# Altium PCB demo_dermis_main_testboard_scratch.PcbDoc (part 6 of 7)
Units mm, origin at the board's own origin, x right, y up, seen from the top; angles counter-clockwise.
Board outline 348.67 x 247.5 mm, 4 copper layers (Top Layer, Layer 1, Layer 2, Bottom Layer), stack 0.603 mm thick; 416 components, 288 nets, 1934 pads, 1690 vias.
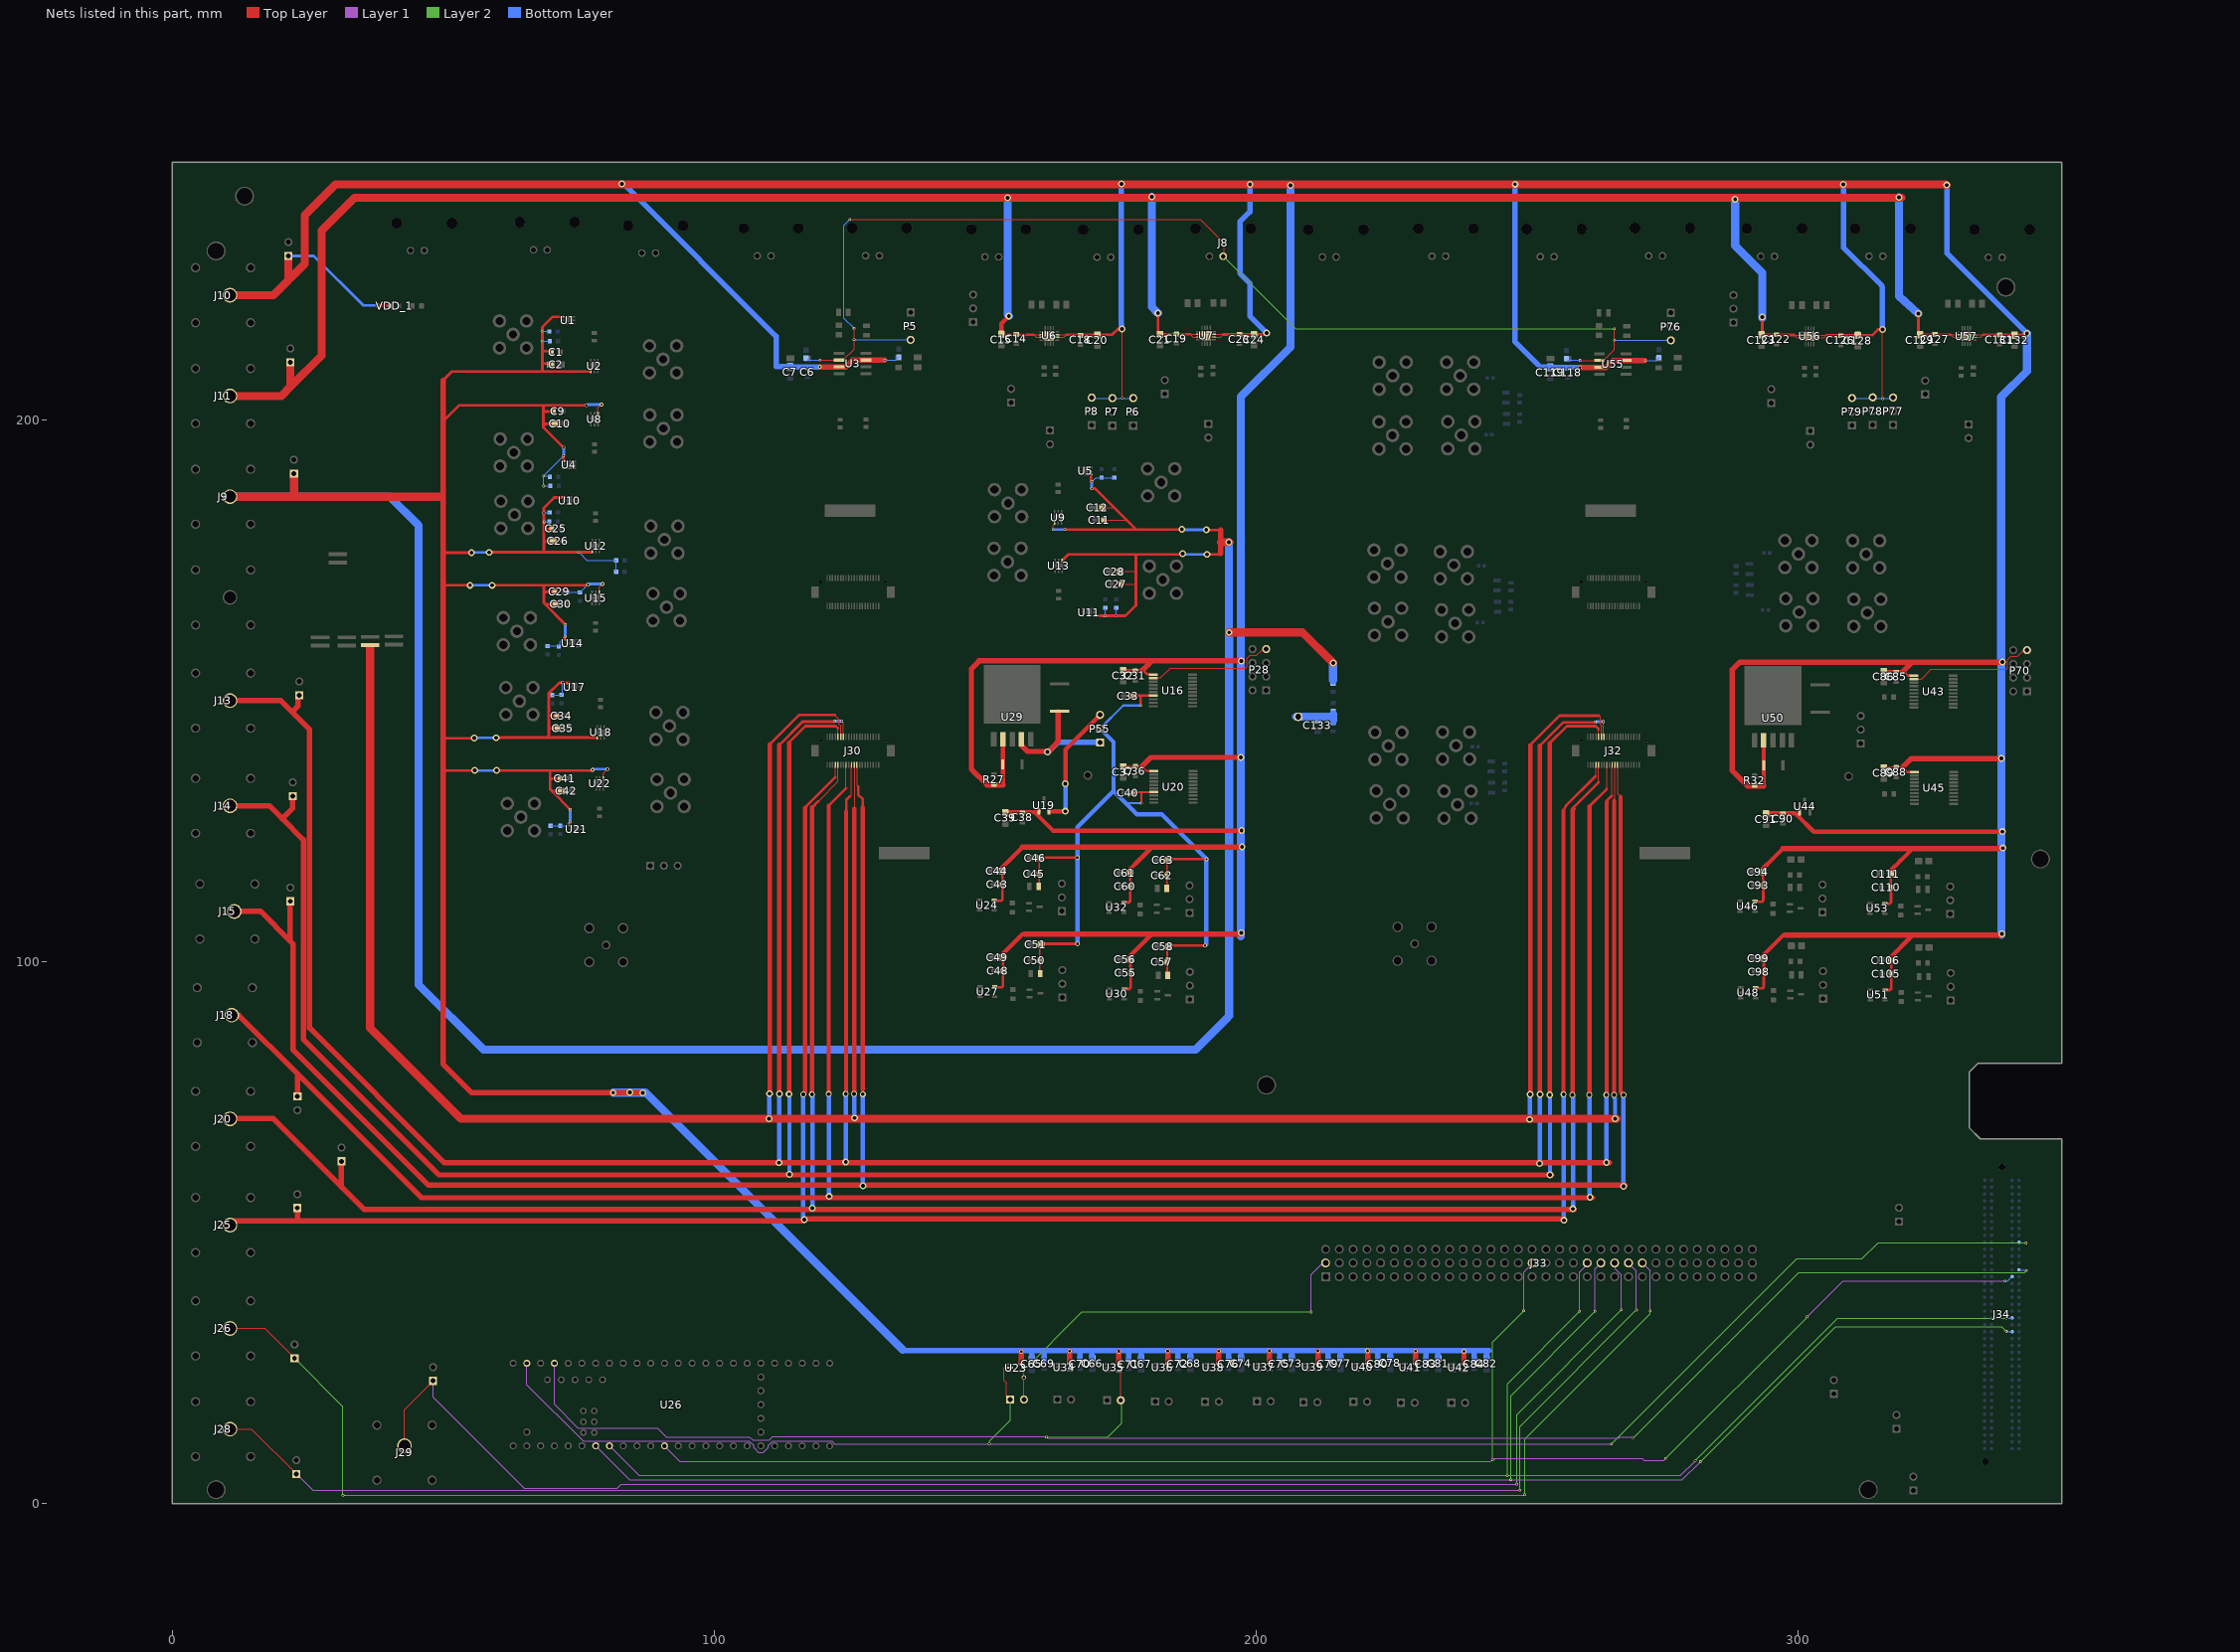
[diagram p7: the nets of this part, all layers, seen from the top]

## Via types
v1: diameter 0.85, hole 0.5, Top Layer to Bottom Layer, 1036 vias
v2: diameter 0.5, hole 0.3, Top Layer to Bottom Layer, 455 vias
v3: diameter 1.27, hole 0.711, Top Layer to Bottom Layer, 133 vias
v4: diameter 0.7, hole 0.4, Top Layer to Bottom Layer, 26 vias
v5: diameter 0.4, hole 0.25, Top Layer to Bottom Layer, 24 vias
v6: diameter 1.1, hole 0.7, Top Layer to Bottom Layer, 16 vias

## Nets (pads, with @x,y where several pads share a name; then routed paths per layer and width w, separated by ;. In a path a pad name is that pad's centre, name@x,y a point inside that pad or via, vN(x,y) a via of type N, cw(c..) or ccw(c..) an arc to the next point about the centre after c; other vN are vias at no path point) (continued)
REQON_EXT: J34.C14 P62.2 U26.2 U35.4 | length 321.4
  Top Layer w0.15: P62.2@175.008,19.064 175.008,24.354 U35.4@175.088,24.434
  Layer 1 w0.15: U26.2@70.525,25.89 70.525,18.288 74.843,13.97 89.536,13.97 91.195,12.311 106.516,12.311 107.116,11.711 110.135,11.711 110.782,12.358 v2@161.215,12.358 ; v2@161.127,12.18 161.215,12.268 v2(161.31,12.268) 161.495,12.083 266.882,12.083 267.058,12.26 267.451,12.26 267.455,12.256 269.432,12.256 v2(269.538,12.15)
  Layer 2 w0.15: v2(161.31,12.268) 172.632,12.268 175.201,14.837 175.201,18.872 P62.2@175.008,19.064 ; v2(269.538,12.15) 269.703,12.15 300.156,42.602 341.711,42.602 v2(342.132,43.024)
  Bottom Layer w0.15: J34.C14@340.746,43.146 340.806,43.085 342.071,43.085 v2(342.132,43.024)
RESETb: J33.47 J34.D15 U26.15 | length 303.3
  Layer 1 w0.15: U26.15@90.845,10.65 93.673,7.822 243.203,7.822 v2@243.383,8.001 ; v2(243.593,8.116) 243.66,8.183 243.989,8.183 244.118,8.312 271.241,8.312 271.581,7.972 275.207,7.972 v2(275.551,8.317) ; v2(249.364,35.592) 249.414,35.642 249.414,42.701 250.904,44.191 J33.47@250.904,44.403 ; v2(301.634,34.459) 308.251,41.076 v2(338.196,41.076)
  Layer 2 w0.15: v2(243.593,8.116) 243.593,29.821 v2(249.364,35.592) ; v2(275.551,8.317) 301.634,34.4 v2(301.634,34.459)
  Bottom Layer w0.15: v2(338.196,41.076) 338.675,41.076 J34.D15@339.476,41.876
RST: J33.2 P61.2 U23.4 | length 76.8
  Top Layer w0.15: U23.4@156.672,24.421 U23.4@157.062,24.421 ; v1(157.131,23.252) 157.131,24.583 157.182,24.633 157.182,24.524 157.079,24.421 U23.4@157.062,24.421 ; P61.2@157.165,19.198 157.165,24.318 U23.4@157.062,24.421
  Layer 1 w0.15: v2@210.128,35.352 210.128,42.258 212.273,44.403 J33.2@212.804,44.403
  Layer 2 w0.15: v1(157.131,23.252) 157.131,24.602 167.882,35.352 v2(210.152,35.352) ; J33.2@212.681,44.28 J33.2@212.804,44.403
RST_EXT: J34.C10 P61.1 U23.2 U26.0 | length 321.3
  Top Layer w0.15: U23.2@154.59,25.071 154.579,25.081 153.459,25.081 153.459,22.723 153.95,22.232 153.95,19.873 P61.1@154.625,19.198 ; v2@341.972,48.16 v2(342.049,48.083)
  Layer 1 w0.15: U26.0@65.445,25.89 65.445,21.931 75.848,11.529 106.45,11.529 107.293,10.685 107.293,10.314 108.137,9.471 109.114,9.471 109.958,10.314 109.958,10.685 110.801,11.529 121.69,11.529 122.189,11.03 v2(150.764,11.03) 265.522,11.03 v2@265.542,11.009
  Layer 2 w0.15: v2(150.764,11.03) 150.764,11.53 154.625,15.39 P61.1@154.625,19.198 ; v2(265.521,10.981) 299.701,45.16 311.757,45.16 314.757,48.16 v2@341.972,48.16
  Bottom Layer w0.15: J34.C10@340.746,48.226 340.821,48.15 341.982,48.15 v2(342.049,48.083)
SCLK: J33.59 J34.D21 U26.19 | length 318.4
  Layer 1 w0.15: U26.19@80.685,10.65 86.105,5.23 v2@246.305,5.23 ; v2(246.325,5.185) 278.266,5.185 v2(280.998,7.917) ; v2(259.667,35.475) 259.667,42.736 261.064,44.132 J33.59@261.064,44.403
  Layer 2 w0.15: v2(246.325,5.185) 246.325,22.133 v2(259.667,35.475) ; v2@280.96,7.918 307.266,34.224 v2(338.399,34.224)
  Bottom Layer w0.15: v2(338.399,34.224) 338.415,34.24 339.459,34.24 J34.D21@339.476,34.256
SDI: J33.62 J34.D23 U26.20 | length 322.9
  Layer 1 w0.15: U26.20@78.145,10.65 84.411,4.383 v2@246.982,4.383 ; v2(246.982,4.371) v2@246.982,4.383 ; v2(262.529,35.471) 262.493,35.507 262.493,43.292 J33.62@263.604,44.403 ; v2(281.931,7.717) 278.597,4.383 v2@246.982,4.383
  Layer 2 w0.15: v2(246.982,4.371) 246.982,19.924 v2(262.529,35.471) ; v2@281.975,7.703 306.882,32.611 337.567,32.611 v2(338.384,31.794)
  Bottom Layer w0.15: v2(338.384,31.794) 338.423,31.755 339.437,31.755 J34.D23@339.476,31.716
VBIAS_2P5V: C33.1 C40.1 C45.1 C46.1 C50.1 C51.1 C57.1 C58.1 C62.1 C63.1 P55.2 R25.1 R26.1 R28.1 R29.1 U16.7 U20.7 | length 156.5
  Top Layer w0.3: R25.1@159.965,114.422 159.965,118.928 C46.1@160,118.989 ; R26.1@160.066,97.794 C51.1@160.066,102.977 ; R29.1@183.531,114.087 C63.1@183.531,118.593 ; R28.1@183.596,97.637 C58.1@183.596,102.643
  Top Layer w0.4: C33.1@177.233,149.052 177.233,149.101 178.668,149.101 ; C40.1@177.3,131.301 178.834,131.301 ; v2(178.668,147.274) 178.668,149.101 ; v2(178.834,129.256) 178.834,131.301 ; U20.7@181.094,131.301 178.834,131.301 ; U16.7@181.244,149.101 178.668,149.101
  Top Layer w0.5: C46.1@160,118.989 160.282,119.272 160.341,119.213 v1(167.003,119.213) ; C51.1@160.101,103.038 160.231,103.168 160.383,103.32 160.39,103.314 v1(167.026,103.314) ; C63.1@183.565,118.654 183.695,118.784 183.848,118.937 183.854,118.93 190.796,118.93 v4(190.834,118.892) ; C58.1@183.631,102.704 183.761,102.835 183.913,102.987 183.92,102.98 v4(190.556,102.98)
  Bottom Layer w0.4: P55.2@171.195,143.01 175.458,147.274 v2(178.668,147.274) ; 173.675,131.71 176.129,129.256 v2(178.834,129.256)
  Bottom Layer w0.8: v1@167,103.314 167,124.822 173.675,131.497 ; P55.2@171.195,143.01 173.675,140.529 173.675,131.71 173.675,131.497 ; v4@190.774,103.199 v4@190.774,118.892 ; v4@190.774,118.99 182.571,127.192 177.98,127.192 173.675,131.497
VD: J26.1 J33.71 P42.1 | length 314.1
  Top Layer w0.2: J26.1@10.67,32.33 17.079,32.33 P42.1@22.589,26.82
  Layer 1 w0.2: v2(31.518,1.565) v2@249.541,1.565 ; J33.71@271.224,44.403 272.665,42.961 v2(272.665,35.574)
  Layer 2 w0.2: P42.1@22.589,26.82 31.518,17.891 v2(31.518,1.565) ; v2(249.541,1.63) 249.537,1.634 249.537,11.877 272.665,35.006 v2(272.665,35.574)
VDAC_RESERVED0: P28.7 U16.2 | length 23.7
  Top Layer w0.2: U16.2@181.278,152.385 182.364,152.385 184.184,154.205 198.062,154.205 198.316,154.459 198.316,155.966 198.877,156.528 200.074,156.528 201.028,157.482 201.643,157.482 P28.7@201.856,157.695
VDAC_RESERVED1: P70.7 U43.2 | length 23.7
  Top Layer w0.2: U43.2@321.638,152.184 322.725,152.184 324.545,154.004 338.423,154.004 338.676,154.258 338.676,155.765 339.238,156.326 340.434,156.326 341.388,157.281 342.003,157.281 P70.7@342.216,157.494
VDD_2P5V: C54.1 P55.1 U29.4 | length 25.4
  Top Layer w0.2: U29.4@156.531,140.273 U29.4@156.531,141.851
  Top Layer w1: U29.4@156.726,139.858 157.781,138.803 161.505,138.745 161.751,138.741 163.465,140.675 C54.1@163.465,146.069
  Bottom Layer w1: v3@161.568,138.609 163.428,140.47 P55.1@171.195,140.47
  other v3: 161.504,138.673
VDD_3P3V_IN: C1.1 C2.1 C9.1 C10.1 C11.1 C12.1 C25.1 C26.1 C27.1 C28.1 C29.1 C30.1 C34.1 C35.1 C41.1 C42.1 C65.1 C66.1 C67.1 C68.1 C69.1 C70.1 C71.1 C72.1 C73.1 C74.1 C75.1 C76.1 C77.1 C78.1 C79.1 C80.1 C81.1 C82.1 C83.1 C84.1 J9.1 P3.1 R46.1 R47.1 R48.1 R49.1 R50.1 R51.1 R52.1 R53.1 R54.1 R55.1 R56.1 R57.1 R58.1 R59.1 R60.1 R61.1 R62.1 R63.1 R64.1 R65.1 R66.2 U1.4 U2.4 U4.4 U5.4 U8.4 U9.4 U10.4 U11.4 U12.4 U13.4 U14.4 U15.4 U17.4 U18.4 U21.4 U22.4 U23.5 U34.5 U35.5 U36.5 U37.5 U38.5 U39.5 U40.5 U41.5 U42.5 | length 1261.4
  Top Layer w0.15: 68.299,210.392 68.318,210.373 ; 68.63,199.243 68.649,199.224 ; C12.1@171.655,183.749 171.687,183.782 173.677,183.782 ; C11.1@171.884,181.454 175.969,181.454 ; C28.1@174.792,171.987 174.824,172.02 177.799,172.02 ; C27.1@175.021,169.692 177.783,169.692 177.799,169.674
  Top Layer w0.2: U4.4@72.134,192.454 U4.4@72.22,192.368 ; U8.4@78.571,201.152 78.571,202.188 v4(79.217,202.833) ; U15.4@78.76,168.034 78.76,169.07 v4(79.405,169.715) ; U22.4@79.501,134.009 79.501,134.723 v4(80.307,135.529) ; v2(162.532,179.773) 162.532,180.526 162.819,180.813 U9.4@162.819,180.966
  Top Layer w0.5: 49.723,135.282 49.989,135.282 v3(55.856,135.283) ; 49.855,141.241 49.989,141.241 v3(55.743,141.242) ; 49.989,169.466 49.992,169.468 v3(54.952,169.47) ; 49.989,199.69 52.985,202.686 68.483,202.686 ; 49.989,207.267 51.656,208.934 68.299,208.934 ; 50.294,175.49 v3(55.236,175.49) ; v3(58.477,175.53) 58.511,175.564 68.58,175.564 ; v3(59.073,169.468) v4@76.614,169.468 ; v3@59.485,141.378 69.483,141.378 ; v3@59.714,135.282 59.976,135.282 v4@77.517,135.282 ; 68.318,210.373 C2.1@69.88,210.373 ; 68.394,212.668 C1.1@69.65,212.668 ; 68.563,169.27 68.563,166.219 v2(72.55,162.231) ; 68.632,179.817 C25.1@70.112,179.817 ; 68.649,199.224 C10.1@70.211,199.224 ; 68.692,168.242 C29.1@70.181,168.242 ; 68.725,201.519 C9.1@69.982,201.519 ; 68.779,177.521 C26.1@70.341,177.521 ; 68.849,165.946 C30.1@70.41,165.946 ; 69.626,143.044 C35.1@71.188,143.044 ; 69.702,145.339 C34.1@70.959,145.339 ; 69.717,135.146 69.717,131.834 70.105,131.446 ; 69.757,133.742 C41.1@71.195,133.742 ; C42.1@71.424,131.446 70.105,131.446 ; U1.4@72.034,219.027 70.198,219.027 68.299,217.128 68.299,210.392 68.299,208.934 ; U4.4@72.134,192.454 72.223,192.542 v2(72.223,193.372) ; v2@72.235,194.863 68.483,198.614 68.483,202.686 ; U10.4@72.283,185.749 72.315,185.657 70.479,185.657 68.58,183.758 v2(68.58,182.833) 68.58,175.564 ; U14.4@72.504,159.497 v2(72.504,160.002) ; U17.4@73.21,151.37 73.218,151.471 71.382,151.471 69.483,149.572 69.483,141.378 ; U21.4@73.407,125.213 v2(73.407,125.815) ; v2(73.458,128.093) 70.105,131.446 ; v4(76.426,202.686) 68.483,202.686 ; 77.067,208.934 68.299,208.934 ; U12.4@77.348,175.564 68.58,175.564 ; 78.252,141.378 69.483,141.378 ; U13.4@164.22,174.066 164.263,174.066 165.356,175.159 ; v2@164.623,179.754 v2(164.684,179.754) v3@186.3,179.754 ; 165.488,175.159 v3@186.409,175.159 ; U5.4@169.506,189.9 169.506,188.73 v2(169.655,188.581) ; v2(169.668,187.314) 170.283,187.314 177.714,179.884 ; U11.4@170.151,163.832 175.9,163.832 177.799,165.73 177.799,169.674 177.799,172.02 177.799,174.929 ; v3(190.797,179.681) 193.185,179.681 ; v3(190.907,175.158) 193.295,175.158
  Top Layer w1: 49.989,185.549 49.989,169.466 49.989,141.241 49.989,135.282 49.989,81.114 55.269,75.834 v3(81.374,75.834) v3@86.692,75.834 ; 49.989,186.038 49.989,199.69 49.989,207.267 ; 156.672,26.115 v1@156.672,28.047 ; 165.577,26.205 v1@165.577,28.138 ; 174.63,26.151 v1(174.63,28.085) ; 183.69,26.201 v1@183.69,28.134 ; 193.059,26.201 v1@193.059,28.134 ; 193.479,175.321 193.479,179.681 ; 202.432,26.246 v1@202.432,28.179 ; 211.393,26.24 v1@211.393,28.173 ; 220.562,26.251 v1@220.562,28.184 ; 229.41,26.19 v1@229.41,28.123 ; 238.339,26.16 v1@238.339,28.093
  Top Layer w1.5: J9.1@10.67,185.809 22.476,185.809 ; P3.1@22.476,190.095 22.476,185.809 ; 49.729,185.809 22.476,185.809 ; 193.536,177.423 v3(194.994,177.423) ; v3(195.003,160.77) 208.523,160.77 v3(214.191,155.102)
  Bottom Layer w0.15: v2(68.251,214.497) 69.463,214.497 R46.1@69.484,214.518 ; v2(68.26,216.362) R47.1@69.439,216.362 ; v2@68.514,189.639 v2(68.514,187.783) R48.1@69.725,187.783 ; v2(68.58,182.833) 69.545,182.833 R51.1@69.628,182.916 ; v2(68.619,181.191) 69.601,181.191 R50.1@69.615,181.205 ; R52.1@69.064,158.243 71.206,158.243 71.232,158.216 71.255,158.216 71.557,158.519 71.557,159.055 v2(72.504,160.002) ; R49.1@69.701,189.647 v2(68.522,189.647) v2@72.243,193.368 ; R56.1@69.806,125.09 72.682,125.09 v2(73.407,125.815) ; R54.1@70.132,149.199 71.823,149.199 R55.1@71.847,149.224 71.977,149.354 v2(71.977,151.489) ; R62.1@72.904,168.116 72.948,168.159 R63.1@75.211,168.159 75.233,168.159 76.207,169.133 76.207,169.161 76.614,169.568 v4(76.757,169.568) ; v2(74.999,175.592) 76.512,174.079 R65.1@81.917,174.079 81.92,174.076 R64.1@81.92,171.945 ; v2(169.655,188.581) 170.396,189.323 R59.1@171.478,189.323 171.487,189.332 R58.1@173.829,189.332 ; v2(172.13,163.81) 172.13,165.287 R61.1@172.175,165.332 ; v2(174.142,163.835) 174.142,165.308 R60.1@174.167,165.333 ; R66.2@214.171,151.271 214.171,151.954
  Bottom Layer w0.2: v3(54.952,169.47) v3(54.952,169.47) ; v3(55.236,175.49) v3@55.255,175.51 ; v3@58.457,175.51 v3(58.477,175.53) ; v2@72.243,194.782 v2(72.243,194.925)
  Bottom Layer w0.5: v3(54.952,169.47) v3(59.073,169.468) ; v3@55.255,175.51 v3@58.457,175.51 ; v3@55.554,141.324 v3(59.797,141.324) v3@60.09,141.324 ; v3@55.856,135.282 v3@60.199,135.282 ; v2@72.243,193.392 v2@72.243,194.782 ; v2@72.525,160.022 v2@72.525,162.292 ; v2@73.458,125.821 v2(73.458,128.093) ; v4@76.573,202.833 v4(79.217,202.833) ; v4@76.76,169.715 v4(79.405,169.715) ; v4@77.663,135.529 v4(80.307,135.529) ; v2(162.532,179.773) 162.55,179.754 v2(164.684,179.754) ; v2(169.668,187.314) v2@169.668,188.581 ; v3@186.51,179.701 v3@190.777,179.701 ; v3@186.619,175.178 v3@190.887,175.178
  Bottom Layer w1: 134.86,28.195 156.672,28.196 158.551,28.196 ; C65.1@158.6,26.565 C65.1@158.6,26.665 158.6,28.146 158.551,28.196 ; 160.86,28.116 160.86,26.535 C69.1@160.889,26.658 ; C70.1@167.458,26.609 167.458,28.19 ; C66.1@169.717,26.579 169.717,28.16 ; C71.1@176.512,26.555 176.512,28.136 ; C67.1@178.77,26.525 178.77,28.106 ; C72.1@185.571,26.605 185.571,28.186 ; C68.1@187.83,26.574 187.83,28.155 ; C76.1@194.94,26.605 194.94,28.186 ; C74.1@197.2,26.574 197.2,28.155 ; C75.1@204.313,26.65 204.313,28.196 ; 204.313,28.231 204.313,28.196 ; C73.1@206.572,26.62 206.572,28.196 ; 206.572,28.201 206.572,28.196 ; C79.1@213.275,26.644 213.275,28.196 ; 213.275,28.225 213.275,28.196 ; C77.1@215.533,26.614 215.533,28.195 ; C80.1@222.443,26.655 222.443,28.196 ; 222.443,28.236 222.443,28.196 ; C78.1@224.703,26.624 224.703,28.196 ; 224.703,28.205 224.703,28.196 ; C83.1@231.291,26.594 231.291,28.175 ; C81.1@233.55,26.563 233.55,28.145 ; C84.1@240.22,26.564 240.22,28.145 ; C82.1@242.479,26.534 242.479,28.115 ; 242.94,28.196 224.703,28.196 ; 158.551,28.196 204.313,28.196 ; 204.313,28.196 206.572,28.196 ; 206.572,28.196 213.275,28.196 ; 213.275,28.196 222.443,28.196 ; 222.443,28.196 224.703,28.196
  Bottom Layer w1.5: J9.1@10.67,185.809 40.136,185.809 45.442,180.504 45.442,95.742 57.44,83.743 188.788,83.743 194.805,89.76 194.805,89.805 195.003,90.002 v3@195.003,160.506 ; v3(81.374,75.834) 87.348,75.834 134.79,28.392 ; v3@194.975,177.423 v3@194.975,177.404 ; v3(194.994,177.423) v3@194.975,177.404 ; v3(195.003,160.77) v3@195.003,160.506 ; 214.171,151.954 214.191,151.974 v3(214.191,155.102) ; v3@194.975,177.404 194.975,160.77 194.975,160.479 v3@195.003,160.506
  other v1: 156.672,28.048 238.338,28.094 229.409,28.123 165.576,28.139 183.689,28.135 193.058,28.135 202.431,28.18 211.393,28.174 220.562,28.185
  other v3: 86.856,75.767 84.434,75.863 59.885,135.323 186.409,175.29 186.3,179.812
  other v4: 77.583,135.382
VDD_5V_IN: C6.1 C7.1 C8.1 C18.1 C20.1 C23.1 C24.1 C31.1 C32.1 C36.1 C37.1 C38.1 C39.1 C43.1 C44.1 C48.1 C49.1 C53.1 C55.1 C56.1 C60.1 C61.1 C85.1 C86.1 C88.1 C89.1 C90.1 C91.1 C93.1 C94.1 C98.1 C99.1 C103.1 C105.1 C106.1 C110.1 C111.1 C118.1 C119.1 C120.1 C126.1 C128.1 C131.1 C132.1 J10.1 P6.3 P7.3 P8.3 P11.1 P77.3 P78.3 P79.3 R27.2 R32.2 U3.3 U3.7 U6.6 U6.7 U7.6 U7.7 U16.1 U19.1 U20.1 U24.5 U27.5 U29.2 U30.5 U32.5 U43.1 U44.1 U45.1 U46.5 U48.5 U50.2 U51.5 U53.5 U55.3 U55.7 U56.6 U56.7 U57.6 U57.7 VDD_1.A | length 1594.4
  Top Layer w0.15: C37.1@175.294,136.21 C37.1@175.455,136.21 ; C37.1@175.469,136.196 C37.1@175.455,136.21 ; C37.1@175.479,136.208 C37.1@175.455,136.21 ; C37.1@175.479,136.208 C37.1@175.595,136.196 ; C89.1@315.655,136.009 C89.1@315.815,136.009 ; C89.1@315.83,135.995 C89.1@315.815,136.009 ; C89.1@315.839,136.007 C89.1@315.815,136.009 ; C89.1@315.84,136.007 C89.1@315.955,135.995
  Top Layer w0.2: v4(119.492,209.761) v4@119.496,209.756 ; 129,211.018 129.003,211.015 v2(131.505,211.015) ; C43.1@153.168,114.576 C43.1@153.195,114.549 ; C48.1@153.269,98.625 C48.1@153.296,98.598 ; U6.6@163.281,215.224 164.515,215.224 164.999,215.708 163.298,215.708 U6.7@163.281,215.725 ; v2@175.263,204.176 v3(175.263,216.771) ; C60.1@176.734,114.241 C60.1@176.761,114.214 ; C55.1@176.799,98.291 C55.1@176.826,98.264 ; U7.6@192.177,215.283 193.411,215.283 193.895,215.767 192.193,215.767 U7.7@192.177,215.784 ; U55.7@267.945,210.914 U55.7@268.269,210.916 ; C93.1@293.529,114.375 C93.1@293.556,114.348 ; C98.1@293.63,98.424 C98.1@293.657,98.397 ; U56.6@303.554,215.145 304.788,215.145 305.271,215.629 U56.7@303.57,215.629 ; v2@315.536,204.097 v3(315.536,216.692) ; C110.1@317.094,114.04 C110.1@317.121,114.013 ; C105.1@317.16,98.09 C105.1@317.187,98.063 ; U57.6@332.449,215.204 333.683,215.204 334.167,215.688 U57.7@332.466,215.688
  Top Layer w0.4: C39.1@153.718,127.474 C39.1@153.845,127.601 ; C37.1@175.453,135.957 175.469,136.051 178.92,136.051 179.77,135.201 U20.1@181.094,135.201 ; C32.1@175.619,153.851 179.07,153.851 179.92,153.001 U16.1@181.244,153.001 ; C91.1@294.078,127.272 C91.1@294.205,127.4 ; 299.923,127.077 U44.1@300.327,127.474 ; U44.1@300.249,127.554 U44.1@300.328,127.475 ; C89.1@315.813,135.756 315.83,135.85 319.28,135.85 320.13,135 U45.1@321.455,135 ; C86.1@315.98,153.65 318.058,153.65 319.43,153.65 320.28,152.8 U43.1@321.605,152.8
  Top Layer w0.5: v1(37.96,221.061) VDD_1.A@40.111,221.061 ; U24.5@151.929,111.247 152.963,111.247 153.195,111.48 C43.1@153.195,114.549 ; U27.5@152.03,95.296 153.064,95.296 153.296,95.529 C48.1@153.296,98.598 ; C43.1@153.168,114.576 C44.1@153.168,116.962 ; C48.1@153.269,98.625 C49.1@153.269,101.011 ; 164.999,215.708 173.422,215.708 174.484,216.771 v3(175.263,216.771) ; U32.5@175.6,110.969 175.494,110.912 176.528,110.912 176.761,111.145 C60.1@176.761,114.214 ; U30.5@175.665,95.02 175.56,94.962 176.594,94.962 176.826,95.195 C55.1@176.826,98.264 ; C60.1@176.734,114.241 C61.1@176.734,116.627 ; C55.1@176.799,98.291 C56.1@176.799,100.677 ; 193.895,215.767 199.632,215.767 v3@202.317,215.767 ; U46.5@292.289,111.046 293.323,111.046 293.556,111.279 C93.1@293.556,114.348 ; U48.5@292.39,95.095 293.424,95.095 293.657,95.328 C98.1@293.657,98.397 ; C93.1@293.529,114.375 C94.1@293.529,116.761 ; C98.1@293.63,98.424 C99.1@293.63,100.81 ; 305.271,215.629 313.694,215.629 314.757,216.692 v3(315.536,216.692) ; U53.5@315.96,110.768 315.855,110.711 316.889,110.711 317.121,110.944 C110.1@317.121,114.013 ; U51.5@316.026,94.819 315.92,94.761 316.954,94.761 317.187,94.994 C105.1@317.187,98.063 ; C110.1@317.094,114.04 C111.1@317.094,116.426 ; C105.1@317.16,98.09 C106.1@317.16,100.476 ; 334.167,215.688 339.904,215.688 v3@342.59,215.688
  Top Layer w0.8: C44.1@153.168,116.962 153.168,117.42 154.923,119.174 156.853,121.103 ; C49.1@153.269,101.011 153.269,101.468 155.024,103.223 156.954,105.152 ; 153.28,132.617 U29.2@153.28,141.057 ; C39.1@153.845,127.601 159.088,127.601 162.494,124.195 v3(197.294,124.195) ; 159.451,127.326 U19.1@159.888,127.755 ; C61.1@176.734,116.627 176.734,117.084 178.489,118.839 180.418,120.768 ; C56.1@176.799,100.677 176.799,101.135 178.554,102.889 180.484,104.818 ; C94.1@293.529,116.761 293.529,117.219 295.284,118.973 297.213,120.902 ; C99.1@293.63,100.81 293.63,101.267 297.314,104.951 ; 293.641,132.416 293.641,136.207 U50.2@293.641,140.856 ; C91.1@294.205,127.4 299.449,127.4 299.771,127.077 302.855,123.994 v3(337.655,123.994) ; C111.1@317.094,116.426 317.094,116.883 318.849,118.638 320.778,120.567 ; C106.1@317.16,100.476 317.16,100.934 320.844,104.618
  Top Layer w1: v4@119.496,209.756 124.262,209.756 125.506,210.999 v2@131.42,210.999 ; 153.28,132.617 150.342,132.617 147.451,135.509 147.451,154.058 148.895,155.501 180.72,155.501 ; 156.853,121.103 196.618,121.103 196.683,121.169 v3(197.387,121.169) ; 157.406,105.128 v3@197.172,105.128 ; 178.92,136.051 180.57,137.701 v3(197.131,137.701) ; 179.07,153.851 180.72,155.501 ; v3(197.281,155.501) 180.72,155.501 ; v4@259.769,209.677 264.535,209.677 265.778,210.92 v2@271.714,210.92 ; 293.641,132.416 291.96,132.416 290.703,132.416 287.812,135.308 287.812,153.856 289.256,155.3 321.08,155.3 ; 297.213,120.902 336.978,120.902 337.044,120.968 v3(337.748,120.968) ; 297.766,104.927 v3@337.532,104.927 ; 319.28,135.85 320.93,137.5 v3(337.492,137.5) ; 319.43,153.65 321.08,155.3 ; v3(337.641,155.3) 321.08,155.3
  Top Layer w1.5: J10.1@10.569,223.088 10.569,223.005 18.697,223.005 21.449,225.758 P11.1@21.449,230.238 ; 21.777,226.086 24.488,228.797 24.488,237.78 30.174,243.464 327.22,243.464 v3(327.369,243.316)
  Bottom Layer w0.15: v1@37.898,221.122 v1(37.96,221.061)
  Bottom Layer w0.2: v2(131.505,211.015) 131.524,211.033 133.506,211.033 134.037,211.564 C8.1@134.037,211.592 ; P8.3@169.139,204.002 P7.3@173.467,204.002 P6.3@177.796,204.002 ; v2@271.796,210.954 273.778,210.954 274.309,211.485 C120.1@274.309,211.513 ; P79.3@309.412,203.923 P77.3@318.068,203.923
  Bottom Layer w0.5: P11.1@21.449,230.238 26.123,230.238 35.238,221.122 v1@37.898,221.122
  Bottom Layer w1: v3@83.514,243.311 111.43,215.394 111.43,209.837 111.461,209.806 C7.1@114.018,209.806 ; C7.1@113.652,209.777 v4@119.454,209.777 ; v3@175.125,243.612 v3(175.125,243.563) 175.125,217.411 175.211,217.324 175.211,216.823 v3(175.263,216.771) ; v3(198.852,243.428) 198.852,238.371 197.011,236.53 197.011,227.028 198.852,225.187 198.852,219.107 v3(201.942,216.017) ; v3(247.753,243.484) 247.731,243.462 247.731,214.457 252.462,209.726 C119.1@254.291,209.726 ; C119.1@254.291,209.698 v4@259.726,209.698 ; v3(308.352,243.429) 308.352,231.76 315.455,224.72 ; v3@315.484,217.245 315.484,224.449 ; v3@327.449,243.316 327.449,230.704 v3(342.215,215.938)
  Bottom Layer w1.5: 197.156,104.675 197.156,137.701 197.156,204.248 206.312,213.404 v3(206.312,243.286) ; v3@337.428,155.422 337.428,204.169 342.215,208.955 v3(342.215,215.938) ; v3@337.516,104.927 337.516,120.968 337.516,123.994 337.516,204.047
  other v2: 315.602,203.919 175.329,203.999 271.778,210.936
  other v3: 337.599,105.121 197.238,105.322 82.996,243.522
  other v4: 259.764,209.682
VDD_ADC_3V: J20.1 J30.32 J32.32 P34.1 | length 427.2
  Top Layer w0.2: 119.209,129.603 122.836,133.229 122.836,134.474 122.826,134.483 122.826,136.226 122.836,136.235 J30.32@122.845,136.33 ; 263.169,133.095 263.169,133.804 263.155,133.818 263.155,136.316 J32.32@263.169,136.33
  Top Layer w0.5: 118.056,128.45 119.209,129.603 ; 258.626,128.552 263.169,133.095
  Top Layer w0.8: v6(118.056,75.525) 118.056,128.45 ; v6(258.36,75.415) 258.36,128.033 258.543,128.216
  Top Layer w1: J20.1@10.674,71 10.702,71.028 18.662,71.028 31.242,58.448 ; P34.1@31.223,63.169 31.242,63.15 31.242,58.448 ; v3@258.654,54.301 35.389,54.301 31.242,58.448
  Bottom Layer w0.15: v6(118.056,75.525) 118.07,75.525 v6@118.114,75.481 ; v6(258.36,75.415) 258.379,75.415 v6@258.447,75.347
  Bottom Layer w0.5: v3(118.114,54.518) v3@118.162,54.566 ; v6@118.114,75.481 v6@118.162,75.433 ; v3(258.447,54.383) v3@258.495,54.431 ; v6@258.447,75.347 v6@258.495,75.299
  Bottom Layer w0.8: v3@118.162,54.566 v6@118.162,75.433 ; v3@258.495,54.431 v6@258.495,75.299
VDD_AFE_3V: J25.1 J30.34 J32.34 P37.1 | length 420.9
  Top Layer w0.2: 122.335,134.044 122.335,136.247 J30.34@122.345,136.33 ; 262.6,134.197 262.669,134.129 J32.34@262.669,136.33
  Top Layer w0.5: 116.756,128.398 117.101,128.743 117.101,128.81 122.335,134.044 ; 256.694,127.894 257.089,128.686 262.6,134.197
  Top Layer w0.8: v6@116.756,75.915 116.756,128.398 ; v6@256.694,75.807 256.694,127.894
  Top Layer w1: J25.1@10.674,51.398 11.472,52.196 23.152,52.196 ; P37.1@23.103,54.561 23.152,54.513 23.152,52.196 ; v3@256.783,52.196 256.458,52.521 116.938,52.521 116.613,52.196 23.152,52.196
  Bottom Layer w0.8: v6(116.438,75.526) 116.438,52.57 v3(116.619,52.389) ; v3@256.719,52.74 v6(256.719,75.539)
  other v3: 256.78,52.272
VDD_DIG_3V: J15.1 J30.18 J32.18 P26.1 | length 452.8
  Top Layer w0.2: J30.18@126.36,136.44 126.36,132.49 126.567,132.283 ; J32.18@266.669,136.33 266.694,136.305 266.694,130.932 267.238,130.388
  Top Layer w0.5: 126.567,132.283 126.567,130.819 127.425,129.961 127.425,128.497 ; v6(127.425,75.551) 127.425,76.425
  Top Layer w0.8: 127.425,76.425 127.425,128.497 ; 267.238,130.388 267.238,75.938 v6(267.759,75.417)
  Top Layer w1: J15.1@11.515,109.317 16.254,109.317 21.792,103.778 ; P26.1@21.792,111.148 21.792,103.778 ; v3@268.027,58.742 47.296,58.742 22.303,83.735 22.303,103.268 21.792,103.778
  Top Layer w1.5: J15.1@11.469,109.27 J15.1@11.515,109.317
  Bottom Layer w0.8: v3(127.425,58.654) v6(127.425,75.551) ; v3(267.759,58.52) v6(267.759,75.417)
VDD_DIG_6V: J13.1 J30.22 J30.27 J32.22 J32.27 P23.1 | length 660
  Top Layer w0.2: v2@122.238,144.318 v2(122.295,144.375) ; v2(123.563,144.404) 123.563,144.323 123.845,144.042 J30.27@123.845,141.625 ; 124.938,130.547 125.101,130.71 125.335,130.71 J30.22@125.335,136.465 ; v2@262.571,144.184 v2(262.628,144.241) ; v2(264.065,144.313) 264.065,141.585 J32.27@264.169,141.48 ; 265.669,130.752 J32.22@265.669,136.33
  Top Layer w0.5: 112.028,140.026 116.319,144.318 v2@122.238,144.318 ; 124.335,127.708 124.375,127.748 124.375,129.861 125,130.486 ; 252.361,139.892 256.653,144.184 v2@262.571,144.184 ; 264.69,129.478 264.69,129.708 265.569,130.587
  Top Layer w0.8: v3(112.028,75.636) 112.028,140.026 112.028,140.066 ; v6@124.335,75.701 124.335,127.708 ; v3(252.361,75.501) 252.361,139.892 ; v6@264.669,75.567 264.669,129.457 264.69,129.478
  Top Layer w1: J13.1@10.674,148.175 20.026,148.175 22.129,146.073 ; P23.1@23.462,149.167 23.212,148.918 23.212,147.156 22.129,146.073 ; v3@265.137,62.925 v3(264.618,62.925) 252.293,62.925 124.284,62.925 111.959,62.925 50.187,62.925 25.341,87.771 25.341,142.86 22.129,146.073
  Bottom Layer w0.5: v3(111.959,62.908) v3@111.993,62.943 ; v3@111.993,75.602 v3(112.028,75.636) ; v2(122.295,144.375) 122.324,144.404 v2(123.563,144.404) ; v3(252.293,62.774) v3@252.327,62.808 ; v3@252.327,75.468 v3(252.361,75.501) ; v2(262.628,144.241) 262.662,144.208 262.767,144.313 v2(264.065,144.313)
  Bottom Layer w0.8: v3@111.993,62.943 v3@111.993,75.602 ; v3(124.284,63.06) v6(124.284,75.583) ; v3@252.327,62.808 v3@252.327,75.468 ; v3(264.618,62.925) v6(264.618,75.449)
VDD_IO_3P3V: J14.1 J30.31 J32.31 P24.1 | length 481.8
  Top Layer w0.2: J30.31@122.836,141.615 122.836,143.077 ; J32.31@263.169,141.48 263.169,142.943
  Top Layer w0.5: 113.829,140.456 116.854,143.482 122.431,143.482 122.836,143.077 ; 254.163,140.321 257.322,143.48 262.631,143.48 263.169,142.943
  Top Layer w0.8: v3(113.829,75.558) 113.829,140.456 ; v3(254.163,75.424) 254.163,140.321
  Top Layer w1: J14.1@10.674,128.764 17.914,128.764 20.302,126.376 ; P24.1@22.233,130.571 22.233,128.308 20.302,126.376 ; v3@254.567,60.659 49.191,60.659 24.191,85.658 24.191,122.487 20.302,126.376
  Bottom Layer w0.8: v3(113.888,60.768) v3@113.888,75.5 ; v3(254.221,60.633) v3@254.221,75.366
VDD_TDIG_3V: J18.1 J30.26 J32.26 P29.1 | length 431.4
  Top Layer w0.2: 124.335,131.995 J30.26@124.335,136.465 ; 264.669,131.86 J32.26@264.669,136.33
  Top Layer w0.5: 23.109,78.659 23.429,78.979 ; 121.134,128.793 124.335,131.995 ; 261.467,128.659 264.669,131.86
  Top Layer w0.8: v6(121.134,75.576) 121.134,128.793 ; v6(261.467,75.442) 261.467,128.659
  Top Layer w1: J18.1@11.003,90.135 12.273,90.135 23.429,78.979 45.973,56.435 v3@262.037,56.435 ; P29.1@23.109,75.099 23.109,78.659
  Bottom Layer w0.15: v6(121.134,75.576) v6@121.254,75.456 ; v6(261.467,75.442) v6@261.587,75.322
  Bottom Layer w0.5: v3@121.194,56.736 v3(121.254,56.676) ; v6@121.194,75.396 v6@121.254,75.456 ; v3@261.527,56.602 v3(261.587,56.542) ; v6@261.527,75.262 v6@261.587,75.322
  Bottom Layer w0.8: v3@121.194,56.736 v6@121.194,75.396 ; v3@261.527,56.602 v6@261.527,75.262
VDIV_1P5V: C133.1 J43.1 R67.1 R68.2 | length 7.5
  Bottom Layer w1.5: J43.1@207.388,145.225 213.719,145.225 ; 214.196,145.694 214.199,145.691 214.199,144.517
VG: J28.1 J33.68 P45.1 | length 294.1
  Top Layer w0.2: J28.1@10.67,13.74 14.648,13.74 P45.1@22.928,5.461
  Layer 1 w0.2: P45.1@22.928,5.461 25.946,2.442 v2(248.659,2.442) ; J33.68@268.684,44.403 270.149,42.938 270.149,35.721 v2(270.151,35.719)
  Layer 2 w0.2: v2(248.659,2.442) 248.659,14.227 v2(270.151,35.719)
VNEG: C14.1 C15.1 C19.1 C21.1 C122.1 C123.1 C127.1 C129.1 J11.1 P13.1 U6.14 U6.15 U6.17 U7.14 U7.15 U7.17 U56.14 U56.15 U56.17 U57.14 U57.15 U57.17 | length 487.9
  Top Layer w0.2: C15.1@152.994,215.762 153,215.756 C15.1@153.031,215.725 ; U6.15@160.399,215.218 160.393,215.224 U6.15@160.386,215.224 159.46,215.224 158.959,215.725 U6.14@160.386,215.725 161.583,215.725 U6.17@161.834,215.474 ; U7.15@189.295,215.277 189.289,215.283 188.355,215.283 187.855,215.784 190.479,215.784 U7.17@190.729,215.533 ; C123.1@293.267,215.683 293.281,215.668 C123.1@293.303,215.646 ; U56.15@300.672,215.139 300.666,215.145 U56.15@300.658,215.145 299.732,215.145 299.232,215.646 U56.14@300.658,215.646 301.856,215.646 U56.17@302.106,215.396 ; U57.15@329.567,215.198 329.561,215.204 328.628,215.204 328.128,215.705 330.751,215.705 U57.17@331.002,215.454
  Top Layer w0.5: C15.1@153.001,215.759 153,215.756 152.987,215.725 C15.1@153.031,215.725 ; C15.1@153.316,215.725 158.959,215.725 ; C21.1@181.882,215.784 v3(181.882,219.705) ; C21.1@182.793,215.784 187.855,215.784 ; v3(293.359,218.958) 293.359,215.746 293.281,215.668 293.26,215.646 293.303,215.646 299.232,215.646 ; C129.1@322.155,215.705 v3(322.155,219.626) ; C129.1@323.065,215.705 328.128,215.705
  Top Layer w0.8: C15.1@152.994,215.762 152.994,217.775 v3(154.367,219.148)
  Top Layer w1.5: J11.1@10.67,204.398 20.125,204.398 21.918,206.192 ; P13.1@21.827,210.612 21.827,206.284 21.918,206.192 ; v3@319.07,240.96 v3(154.135,240.96) 33.631,240.96 27.571,234.9 27.571,211.844 21.918,206.192
  Bottom Layer w1.5: v3(154.135,240.96) 154.135,219.381 v3(154.367,219.148) ; v3(180.744,241.149) 180.744,220.844 v3(181.882,219.705) ; v3(288.364,240.68) 288.364,232.15 293.359,227.154 v3(293.359,218.958) v3@293.359,218.783 ; v3(318.603,241.064) 318.603,222.821 v3(322.155,219.626)
VOCM_IN: C3.1 C115.1 J8.2 P5.3 P76.3 U3.2 U55.2 | length 219.9
  Top Layer w0.2: v2(119.506,211.042) 119.516,211.031 U3.2@122.909,211.031 ; U3.2@123.058,211.031 U3.2@123.069,211.021 123.78,211.021 125.824,213.066 v2(125.824,216.877) ; v2(125.031,236.996) 189.646,236.996 194.077,232.565 194.077,230.347 J8.2@193.905,230.174 ; v2(259.779,210.963) 259.789,210.952 U55.2@263.178,210.952 ; U55.2@263.331,210.952 U55.2@263.341,210.942 264.052,210.942 266.097,212.987 v2(266.097,216.798)
  Layer 2 w0.2: J8.2@193.905,230.174 207.28,216.798 v2(266.097,216.798)
  Bottom Layer w0.2: C3.1@117.111,211.215 117.267,211.06 v2@119.506,211.06 ; v2(125.031,236.996) 123.942,235.907 123.942,218.76 v2(125.824,216.877) ; v2(125.798,214.766) 125.807,214.758 136.24,214.758 P5.3@136.248,214.749 ; C115.1@257.383,211.136 257.539,210.981 v2@259.779,210.981 ; v2(266.07,214.687) 266.079,214.679 276.512,214.679 P76.3@276.521,214.67
VREF_2P5V: P55.3 U19.2 | length 23.5
  Top Layer w0.8: U19.2@161.788,127.755 v3(164.813,127.755) ; v3(164.813,132.87) 164.813,139.169 P55.3@171.195,145.55
  Bottom Layer w0.8: v3(164.813,127.755) v3(164.813,132.87)
VS: J29.1 J33.65 P48.1 | length 273.7
  Top Layer w0.2: J29.1@42.865,10.67 42.865,17.366 P48.1@48.15,22.651
  Layer 1 w0.2: P48.1@48.15,22.651 48.15,19.595 64.953,2.792 82.13,2.792 82.859,3.522 v2@247.973,3.522 ; J33.65@266.144,44.403 266.306,44.24 266.306,43.278 267.395,42.189 v2(267.395,35.768)
  Layer 2 w0.2: v2(248.07,3.574) 248.07,16.443 v2(267.395,35.768)
VSS: J30.20 J30.29 J32.20 J32.29 R15.2 | length 613.6
  Top Layer w0.2: 122.224,145.526 123.014,144.736 123.014,143.846 123.335,143.524 J30.29@123.335,141.615 ; v6(125.82,75.606) v6@125.836,75.621 ; J30.20@125.836,136.465 125.836,136.33 125.836,128.247 ; 263.234,145.391 263.499,145.127 263.499,143.667 263.669,143.496 J32.29@263.669,141.48 ; v6(266.038,75.401) v6@266.188,75.251 ; 266.169,129.839 J32.20@266.169,136.33
  Top Layer w0.5: 110.229,140.098 115.657,145.526 122.224,145.526 ; 250.563,139.963 255.99,145.391 263.234,145.391
  Top Layer w0.8: v3(110.229,75.651) 110.229,140.098 ; v6@125.836,75.621 125.836,128.247 ; v3(250.563,75.516) 250.563,139.963 ; v6(266.038,75.401) 266.038,129.69
  Top Layer w1.5: 36.485,87.795 36.533,87.746 ; 36.533,157.875 36.533,87.746 ; v3@266.498,71.02 v3(266.222,71.02) 53.259,71.02 36.533,87.746
  Bottom Layer w0.2: v6(125.82,75.606) v6@125.855,75.572 ; v3@125.855,71.189 v3(125.889,71.154) ; v3@266.188,71.055 v3(266.222,71.02)
  Bottom Layer w0.5: v3(250.437,70.89) v3@250.5,70.952 ; v3@250.5,75.454 v3(250.563,75.516)
  Bottom Layer w0.8: v3@110.166,71.087 v3@110.166,75.588 ; v3@125.855,71.189 v6@125.855,75.572 ; v3@250.5,70.952 v3@250.5,75.454 ; v6(266.038,75.401) 266.038,74.939 266.222,74.755 266.222,71.089 v3@266.188,71.055
  other v3: 110.104,71.024
pads on no net: C1.0 C2.0 C6.0 C7.0 C9.0 C10.0 C11.0 C12.0 C14.0 C15.0 C18.0 C19.0 C20.0 C21.0 C23.0 C24.0 C25.0 C26.0 C27.0 C28.0 C29.0 C30.0 C31.0 C32.0 C33.0 C34.0 C35.0 C36.0 C37.0 C38.0 C39.0 C40.0 C41.0 C42.0 C43.0 C44.0 C45.0 C46.0 C47.0 C48.0 C49.0 C50.0 C51.0 C52.0 C55.0 C56.0 C57.0 C58.0 C59.0 C60.0 C61.0 C62.0 C63.0 C64.0 C65.0 C66.0 C67.0 C68.0 C69.0 C70.0 C71.0 C72.0 C73.0 C74.0 C75.0 C76.0 C77.0 C78.0 C79.0 C80.0 C81.0 C82.0 C83.0 C84.0 C85.0 C86.0 C87.0 C88.0 C89.0 C90.0 C91.0 C92.0 C93.0 C94.0 C95.0 C96.0 C97.0 C98.0 C99.0 C100.0 C101.0 C102.0 C105.0 C106.0 C107.0 C108.0 C109.0 C110.0 C111.0 C112.0 C113.0 C114.0 C118.0 C119.0 C122.0 C123.0 C126.0 C127.0 C128.0 C129.0 C131.0 C132.0 C133.0 J1.3 J1.5 J2.3 J2.5 J3.3 J3.5 J4.3 J4.5 J5.3 J5.5 J6.3 J6.5 J7.3 J7.5 J8.3 J8.5 J9.2 J9.3 J9.4 J9.5 J10.2 J10.3 J10.4 J10.5 J11.2 J11.3 J11.4 J11.5 J12.2 J12.3 J12.4 J12.5 J13.2 J13.3 J13.4 J13.5 J14.2 J14.3 J14.4 J14.5 J15.2 J15.3 J15.4 J15.5 J16. J18.2 J18.3 J18.4 J18.5 J20.2 J20.3 J20.4 J20.5 J23. J25.2 J25.3 J25.4 J25.5 J26.2 J26.3 J26.4 J26.5 J28.2 J28.3 J28.4 J28.5 J29.2 J29.3 J29.4 J29.5 J30. J32. J34. J34.C02 J34.C03 J34.C06 J34.C07 J34.C30 J34.C31 J34.C34 J34.C37 J34.D01 J34.D04 J34.D05 J34.D24 J34.D26 J34.D27 J34.D29 J34.D30 J34.D31 J34.D32 J34.D33 J34.D34 J34.D35 J34.D36 J34.D38 J34.D40 J34.G02 J34.G03 J34.G06 J34.G07 J34.G09 J34.G10 J34.G12 J34.G13 J34.G15 J34.G16 J34.G18 J34.G19 J34.G21 J34.G22 J34.G24 J34.G25 J34.G27 J34.G28 J34.G30 J34.G31 J34.G33 J34.G34 J34.G36 J34.G37 J34.H01 J34.H02 J34.H04 J34.H05 J34.H08 J34.H10 J34.H11 J34.H13 J34.H14 J34.H16 J34.H17 J34.H19 J34.H20 J34.H22 J34.H23 J34.H25 J34.H26 J34.H28 J34.H29 J34.H31 J34.H32 J34.H34 J34.H35 J34.H37 J34.H38 J34.H40 J36.3 J36.5 J37.3 J37.5 J38.3 J38.5 J39.3 J39.5 J40.3 J40.5 J41.3 J41.5 J42.3 J42.5 R27.0 R32.0 R85.0 U6.8 U7.8 U16.5 U16.6 U16.15 U16.16 U16.17 U20.5 U20.6 U20.15 U20.16 U20.17 U23.1 U26.3.3V_1 U26.3.3V_2 U26.3.3V_3 U26.5V U26.41 U26.D+ U26.D- U26.LED U26.ON/OFF U26.PROGRAM U26.R+ U26.R- U26.T+ U26.T- U26.USB_GND1 U26.USB_GND2 U26.VBAT U26.VIN U26.VUSB U34.1 U35.1 U36.1 U37.1 U38.1 U39.1 U40.1 U41.1 U42.1 U43.5 U43.6 U43.15 U43.16 U43.17 U45.5 U45.6 U45.15 U45.16 U45.17 U56.8 U57.8 VDD_1.0
copper on no net: | length 0.1
  Bottom Layer w0.15: 262.106,173.401 262.156,173.351
  Bottom Layer w0.2: 332.913,217.223 332.917,217.223

## Polygon pours and split planes (outlines as drawn)
GND on Top Layer (solid, pour order 298): 139 vertices, not listed, extent 126.706,139.892 129.22,145.475
GND on Top Layer (solid, pour order 294): 141 vertices, not listed, extent 266.996,139.892 269.493,145.37
GND on Top Layer "Top Layer-GND 5" (solid, remove dead copper, pour order 234): 60 vertices, not listed, extent 1.005,1.275 373.408,246.059
GND on Top Layer "Top Layer-GND 1" (solid, pour order 236): 123.249,157.723 122.33,157.723 104.025,139.419 104.025,118.7 56.532,118.7 56.532,84.39 199.339,84.39 204.301,89.352 204.853,89.352 204.853,158.642 204.027,159.468 124.018,159.468 124.018,158.519 123.222,157.723
CHIPB_VCM on Top Layer "Top Layer-CHIPB_VCM" (solid, remove dead copper, pour order 214): 18 vertices, not listed, extent 214.924,122.427 277.003,219.391
CHIPB_VCM on Top Layer "Top Layer-CHIPB_VCM 1" (solid, remove dead copper, pour order 212): 326.866,186.637 326.866,162.194 323.673,159 276.015,159 276.015,163.299 276.875,164.159 278.717,164.159 278.717,166.861 298.738,186.883 299.23,186.391 326.498,186.391
CHIPA_VCM on Top Layer "Top Layer-CHIPA_VCM" (solid, remove dead copper, pour order 210): 28 vertices, not listed, extent 55.515,121.936 204.4,222.859
GND on Top Layer "Top Layer-GND" (solid, remove dead copper, pour order 244): 48 vertices, not listed, extent 2.861,193.203 239.389,246.965
GND on Top Layer "Top Layer-GND 6" (solid, pour order 242): 56.86,74.662 56.621,74.423 57.816,73.229 207.378,73.229 207.378,87.086 204.511,89.953 57.099,89.953 57.099,86.847 56.86,86.608
GND on Top Layer "Top Layer-GND 11" (solid, pour order 240): 57.103,118.491 56.667,118.927 45.993,118.927 45.993,77.755 44.468,76.23 59.281,76.23 59.281,118.709 59.499,118.927
GND on Top Layer "Top Layer-GND 10" (solid, pour order 238): 215.822,117.646 215.386,118.081 203.187,118.081 203.187,75.384 218.001,75.384 218.001,117.864 218.218,118.081
GND on Top Layer "Top Layer-GND 5" (solid, remove dead copper, shelved, pour order 70): 60 vertices, not listed, extent 0.978,1.206 373.382,245.99
GND on Top Layer "Top Layer-GND 1" (solid, shelved, pour order 170): 123.222,157.654 122.303,157.654 103.999,139.35 103.999,118.63 56.506,118.63 56.506,84.32 199.312,84.32 204.275,89.283 204.826,89.283 204.826,158.573 204,159.399 123.991,159.399 123.991,158.45 123.195,157.653
GND on Top Layer "Top Layer-GND 10" (solid, shelved, pour order 196): 215.796,117.576 215.36,118.012 203.161,118.012 203.161,75.315 217.974,75.315 217.974,117.794 218.192,118.012
GND on Top Layer "Top Layer-GND 11" (solid, shelved, pour order 192): 57.077,118.422 56.641,118.857 45.966,118.857 45.966,77.685 44.442,76.161 59.255,76.161 59.255,118.64 59.472,118.857
CHIPA_VCM on Top Layer "Top Layer-CHIPA_VCM" (solid, remove dead copper, shelved, pour order 66): 28 vertices, not listed, extent 55.338,122.378 204.222,223.302
CHIPA_VCM on Top Layer "Top Layer-CHIPA_VCM" (solid, remove dead copper, shelved, pour order 22): 29 vertices, not listed, extent 55.336,122.38 204.221,223.303
CHIPB_VCM on Top Layer "Top Layer-CHIPB_VCM 1" (solid, remove dead copper, shelved, pour order 82): 325.956,186.499 325.956,162.056 322.763,158.862 275.105,158.862 275.105,163.161 275.965,164.021 277.807,164.021 277.807,166.723 297.828,186.745 298.32,186.253 325.588,186.253
CHIPB_VCM on Top Layer "Top Layer-CHIPB_VCM" (solid, remove dead copper, shelved, pour order 80): 18 vertices, not listed, extent 214.014,122.289 276.093,219.253
GND on Top Layer "Top Layer-GND 6" (solid, shelved, pour order 174): 56.834,74.593 56.595,74.354 57.789,73.16 207.352,73.16 207.352,87.017 204.485,89.884 57.072,89.884 57.072,86.777 56.834,86.539
GND on Top Layer "Top Layer-GND" (solid, remove dead copper, shelved, pour order 14): 48 vertices, not listed, extent 2.835,193.134 239.363,246.896
GND on Top Layer "Top Layer-GND 3" (solid, shelved, pour order 46): 125.353,152.502
GND on Top Layer "Top Layer-GND 4" (solid, shelved, pour order 44): 119.845,150.417
GND on Layer 1 (solid, pour order 296): 303 vertices, not listed, extent 78.258,101.256 129.22,152.173
GND on Layer 1 "Top Layer-GND 5" (solid, remove dead copper, pour order 248): 60 vertices, not listed, extent 1.004,1.276 373.408,246.06
GND on Layer 1 "Top Layer-GND 1" (solid, pour order 258): 123.248,157.724 122.329,157.724 104.025,139.42 104.025,118.7 56.531,118.7 56.531,84.39 199.338,84.39 204.301,89.353 204.852,89.353 204.852,158.643 204.026,159.469 124.017,159.469 124.017,158.52 123.221,157.723
CHIPB_VCM on Layer 1 "Top Layer-CHIPB_VCM 1" (solid, remove dead copper, pour order 224): 326.866,186.637 326.866,162.194 323.673,159 276.015,159 276.015,163.299 276.875,164.159 278.717,164.159 278.717,166.861 298.738,186.883 299.23,186.391 326.498,186.391
CHIPB_VCM on Layer 1 "Top Layer-CHIPB_VCM" (solid, remove dead copper, pour order 222): 18 vertices, not listed, extent 214.924,122.427 277.003,219.391
CHIPA_VCM on Layer 1 "Top Layer-CHIPA_VCM" (solid, remove dead copper, pour order 216): 28 vertices, not listed, extent 55.515,121.936 204.4,222.859
GND on Layer 1 "Top Layer-GND 10" (solid, pour order 256): 215.822,117.646 215.386,118.082 203.187,118.082 203.187,75.385 218,75.385 218,117.864 218.218,118.082
GND on Layer 1 "Top Layer-GND 11" (solid, pour order 254): 57.102,118.492 56.667,118.927 45.992,118.927 45.992,77.755 44.468,76.231 59.281,76.231 59.281,118.71 59.498,118.927
GND on Layer 1 "Top Layer-GND 6" (solid, pour order 252): 56.86,74.663 56.621,74.424 57.815,73.23 207.377,73.23 207.377,87.087 204.511,89.954 57.098,89.954 57.098,86.847 56.86,86.609
GND on Layer 1 "Top Layer-GND" (solid, remove dead copper, pour order 250): 48 vertices, not listed, extent 2.861,193.204 239.389,246.966
GND on Layer 1 "Top Layer-GND 2" (solid, remove dead copper, shelved, pour order 92): 45.345,119.796 244.755,119.796 244.755,75.759 244.098,75.102 46.351,75.102 46.351,116.819 47.336,117.805
GND on Layer 1 "Top Layer-GND 5" (solid, remove dead copper, shelved, pour order 88): 60 vertices, not listed, extent 0.992,1.224 373.396,246.008
GND on Layer 1 "Top Layer-GND 1" (solid, shelved, pour order 94): 123.254,157.82 122.335,157.82 104.03,139.516 104.03,118.797 56.537,118.797 56.537,84.487 199.344,84.487 204.306,89.449 204.858,89.449 204.858,158.739 204.032,159.565 124.023,159.565 124.023,158.616 123.227,157.82
CHIPB_VCM on Layer 1 "Top Layer-CHIPB_VCM 1" (solid, remove dead copper, shelved, pour order 86): 326.301,185.859 326.301,161.415 323.107,158.222 275.449,158.222 275.449,162.521 276.309,163.381 278.151,163.381 278.151,166.083 298.173,186.104 298.664,185.613 325.933,185.613
CHIPB_VCM on Layer 1 "Top Layer-CHIPB_VCM" (solid, remove dead copper, shelved, pour order 84): 18 vertices, not listed, extent 214.083,122.245 276.162,219.209
CHIPA_VCM on Layer 1 "Top Layer-CHIPA_VCM" (solid, remove dead copper, shelved, pour order 68): 28 vertices, not listed, extent 55.599,121.728 204.483,222.652
GND on Layer 1 "Top Layer-GND" (solid, remove dead copper, shelved, pour order 90): 48 vertices, not listed, extent 2.849,193.152 239.377,246.914
GND on Layer 2 (solid, pour order 292): 315 vertices, not listed, extent 227.426,101.496 269.493,152.124
GND on Layer 2 "Top Layer-GND 5" (solid, remove dead copper, pour order 260): 60 vertices, not listed, extent 1.005,1.275 373.408,246.059
GND on Layer 2 "Top Layer-GND 1" (solid, pour order 270): 123.249,157.723 122.33,157.723 104.025,139.419 104.025,118.7 56.532,118.7 56.532,84.39 199.339,84.39 204.301,89.352 204.853,89.352 204.853,158.642 204.027,159.468 124.018,159.468 124.018,158.519 123.222,157.723
CHIPB_VCM on Layer 2 "Top Layer-CHIPB_VCM" (solid, remove dead copper, pour order 228): 18 vertices, not listed, extent 214.924,122.427 277.003,219.391
CHIPB_VCM on Layer 2 "Top Layer-CHIPB_VCM 1" (solid, remove dead copper, pour order 226): 326.866,186.637 326.866,162.194 323.673,159 276.015,159 276.015,163.299 276.875,164.159 278.717,164.159 278.717,166.861 298.738,186.883 299.23,186.391 326.498,186.391
CHIPA_VCM on Layer 2 "Top Layer-CHIPA_VCM" (solid, remove dead copper, pour order 218): 28 vertices, not listed, extent 55.515,121.936 204.4,222.859
GND on Layer 2 "Top Layer-GND 10" (solid, pour order 268): 215.822,117.646 215.387,118.081 203.188,118.081 203.188,75.384 218.001,75.384 218.001,117.864 218.218,118.081
GND on Layer 2 "Top Layer-GND 11" (solid, pour order 266): 57.103,118.491 56.667,118.927 45.993,118.927 45.993,77.755 44.468,76.23 59.281,76.23 59.281,118.709 59.499,118.927
GND on Layer 2 "Top Layer-GND 6" (solid, pour order 264): 56.861,74.662 56.621,74.423 57.816,73.229 207.378,73.229 207.378,87.086 204.511,89.953 57.099,89.953 57.099,86.847 56.861,86.608
GND on Layer 2 "Top Layer-GND" (solid, remove dead copper, pour order 262): 48 vertices, not listed, extent 2.862,193.203 239.39,246.965
GND on Layer 2 "Top Layer-GND 2" (solid, remove dead copper, shelved, pour order 100): 45.014,120.11 244.424,120.11 244.424,76.073 243.767,75.416 46.019,75.416 46.019,117.133 47.005,118.119
GND on Layer 2 "Top Layer-GND 5" (solid, remove dead copper, shelved, pour order 96): 60 vertices, not listed, extent 0.661,1.538 373.064,246.321
GND on Layer 2 "Top Layer-GND 1" (solid, remove dead copper, shelved, pour order 102): 122.922,158.134 122.003,158.134 103.699,139.829 103.699,119.11 56.206,119.11 56.206,84.8 199.013,84.8 203.975,89.763 204.526,89.763 204.526,159.053 203.7,159.879 123.692,159.879 123.692,158.929 122.895,158.133
CHIPB_VCM on Layer 2 "Top Layer-CHIPB_VCM 1" (solid, remove dead copper, shelved, pour order 118): 326.003,186.49 326.003,162.047 322.809,158.853 275.151,158.853 275.151,163.152 276.011,164.012 277.853,164.012 277.853,166.714 297.875,186.736 298.366,186.244 325.635,186.244
CHIPB_VCM on Layer 2 "Top Layer-CHIPB_VCM" (solid, remove dead copper, shelved, pour order 116): 18 vertices, not listed, extent 214.06,122.28 276.139,219.244
CHIPA_VCM on Layer 2 "Top Layer-CHIPA_VCM" (solid, remove dead copper, shelved, pour order 114): 29 vertices, not listed, extent 55.383,122.371 204.267,223.294
CHIPA_VCM on Layer 2 "Top Layer-CHIPA_VCM" (solid, remove dead copper, shelved, pour order 112): 28 vertices, not listed, extent 55.384,122.369 204.269,223.293
GND on Layer 2 "Top Layer-GND" (solid, remove dead copper, shelved, pour order 98): 48 vertices, not listed, extent 2.518,193.466 239.046,247.228
GND on Bottom Layer "Top Layer-GND 5" (solid, remove dead copper, pour order 272): 60 vertices, not listed, extent 1.005,1.276 373.408,246.06
GND on Bottom Layer "Top Layer-GND 1" (solid, pour order 282): 123.249,157.724 122.33,157.724 104.025,139.42 104.025,118.7 56.532,118.7 56.532,84.39 199.339,84.39 204.301,89.353 204.853,89.353 204.853,158.643 204.027,159.469 124.018,159.469 124.018,158.52 123.222,157.723
CHIPB_VCM on Bottom Layer "Top Layer-CHIPB_VCM 1" (solid, remove dead copper, pour order 232): 326.866,186.637 326.866,162.194 323.673,159 276.015,159 276.015,163.299 276.875,164.159 278.717,164.159 278.717,166.861 298.738,186.883 299.23,186.391 326.498,186.391
CHIPB_VCM on Bottom Layer "Top Layer-CHIPB_VCM" (solid, remove dead copper, pour order 230): 18 vertices, not listed, extent 214.924,122.427 277.003,219.391
CHIPA_VCM on Bottom Layer "Top Layer-CHIPA_VCM" (solid, remove dead copper, pour order 220): 28 vertices, not listed, extent 55.515,121.936 204.4,222.859
GND on Bottom Layer "Top Layer-GND 10" (solid, pour order 280): 215.822,117.646 215.386,118.082 203.187,118.082 203.187,75.385 218.001,75.385 218.001,117.864 218.218,118.082
GND on Bottom Layer "Top Layer-GND 11" (solid, pour order 278): 57.103,118.492 56.667,118.927 45.993,118.927 45.993,77.755 44.468,76.231 59.281,76.231 59.281,118.71 59.499,118.927
GND on Bottom Layer "Top Layer-GND 6" (solid, pour order 276): 56.86,74.663 56.621,74.424 57.816,73.23 207.378,73.23 207.378,87.087 204.511,89.954 57.099,89.954 57.099,86.847 56.86,86.609
GND on Bottom Layer "Top Layer-GND" (solid, remove dead copper, pour order 274): 48 vertices, not listed, extent 2.861,193.204 239.389,246.966
GND on Bottom Layer "Bottom Layer-GND" (solid, remove dead copper, shelved, pour order 208): 124.118,158.993 203.961,158.993 204.758,159.79 205.076,159.471 205.076,116.882 106.743,116.882 103.655,119.971 103.655,139.368 123.691,159.404
GND on Bottom Layer "Top Layer-GND 2" (solid, remove dead copper, shelved, pour order 110): 45.806,119.825 245.216,119.825 245.216,75.788 244.559,75.131 46.811,75.131 46.811,116.849 47.797,117.834
GND on Bottom Layer "Top Layer-GND 5" (solid, remove dead copper, shelved, pour order 106): 60 vertices, not listed, extent 1.453,1.253 373.856,246.037
CHIPB_VCM on Bottom Layer "Top Layer-CHIPB_VCM 1" (solid, remove dead copper, shelved, pour order 122): 326.05,186.448 326.05,162.004 322.856,158.811 275.198,158.811 275.198,163.11 276.058,163.97 277.9,163.97 277.9,166.672 297.922,186.693 298.413,186.202 325.682,186.202
CHIPB_VCM on Bottom Layer "Top Layer-CHIPB_VCM" (solid, remove dead copper, shelved, pour order 120): 18 vertices, not listed, extent 214.107,122.237 276.186,219.201
CHIPA_VCM on Bottom Layer "Top Layer-CHIPA_VCM" (solid, remove dead copper, shelved, pour order 126): 29 vertices, not listed, extent 55.43,122.328 204.314,223.252
CHIPA_VCM on Bottom Layer "Top Layer-CHIPA_VCM" (solid, remove dead copper, shelved, pour order 124): 28 vertices, not listed, extent 55.431,122.327 204.316,223.25
GND on Bottom Layer "Top Layer-GND" (solid, remove dead copper, shelved, pour order 104): 48 vertices, not listed, extent 3.31,193.181 239.838,246.943